# Altium PCB Master.PcbDoc
Units mm, origin at the board's own origin, x right, y up, seen from the top; angles counter-clockwise.
Board outline 19 x 23.4 mm, 2 copper layers (Top Layer, Bottom Layer); 7 components, 12 nets, 38 pads, 17 vias.
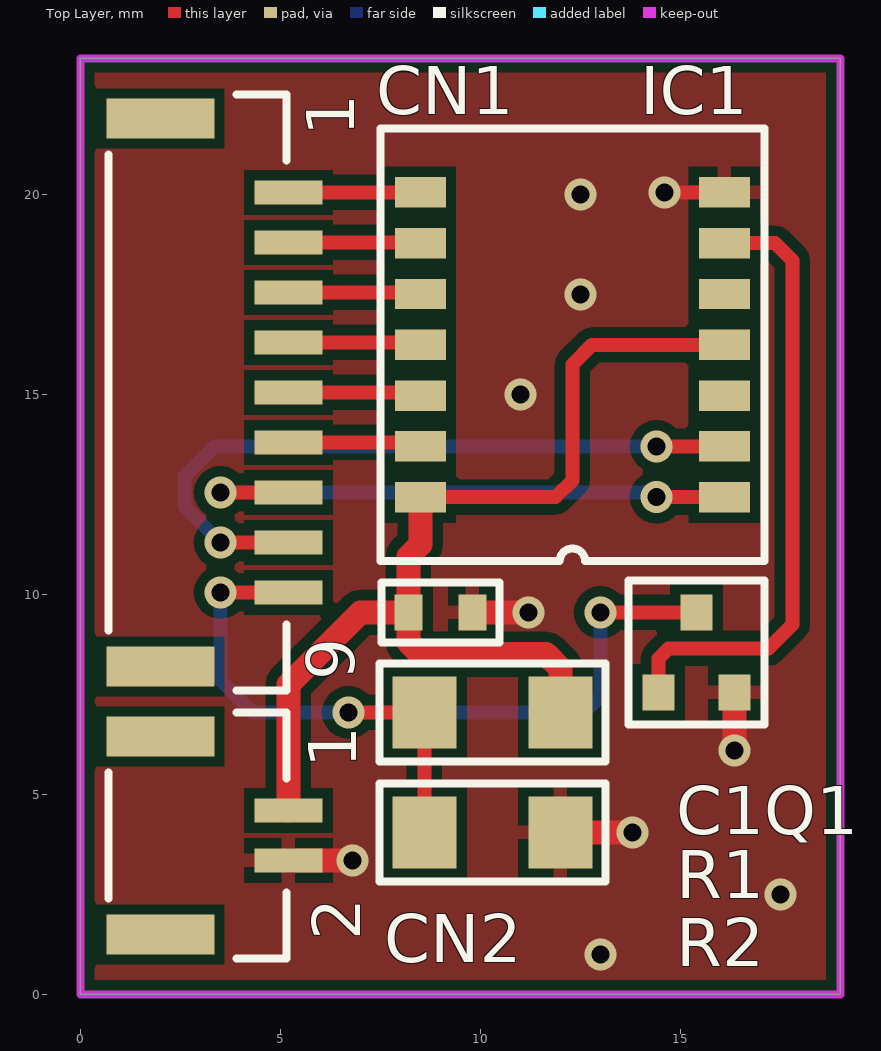
[diagram p0: Top Layer view]
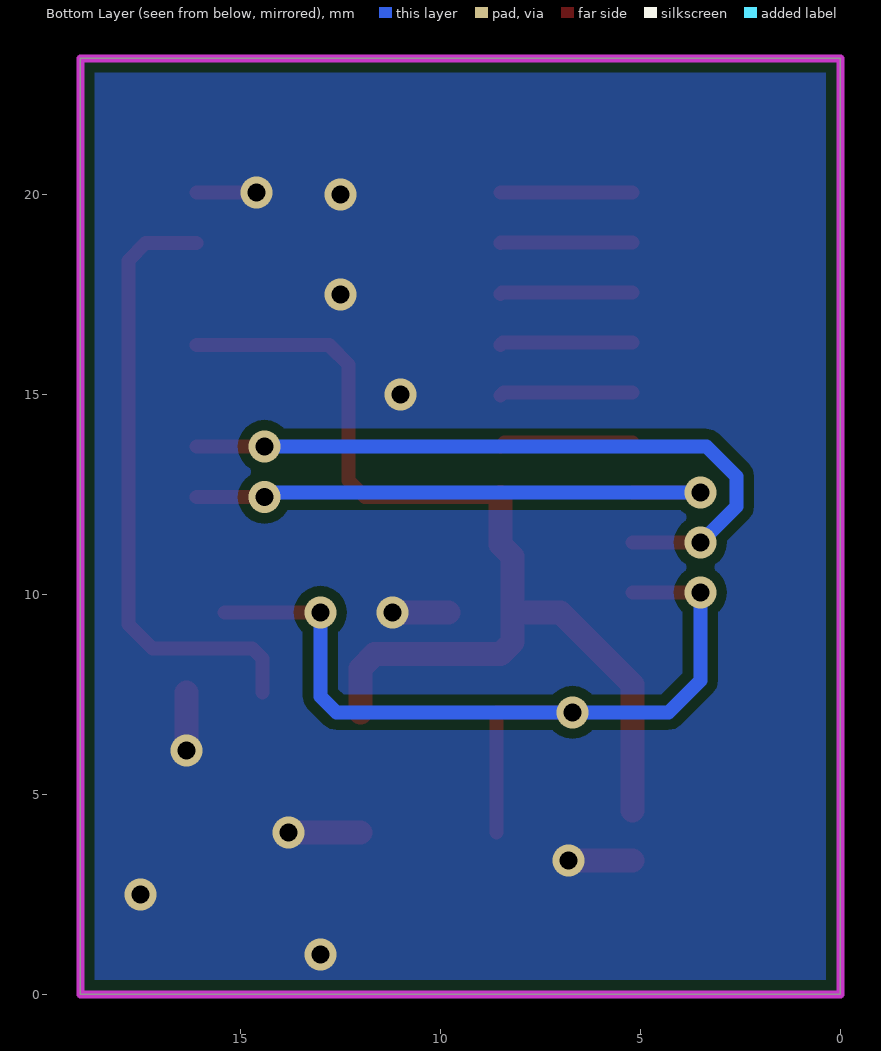
[diagram p1: Bottom Layer view, seen from below]

## Layer stack, top to bottom
Top Solder: solder mask 0.0102, Solder Resist, Dk 3.5
Top Layer: signal copper 0.0356
Dielectric 1: dielectric 0.32, FR-4, Dk 4.8
Bottom Layer: signal copper 0.0356
Bottom Solder: solder mask 0.0102, Solder Resist, Dk 3.5

## Board outline
0,0 0,23.4 19,23.4 19,0

## Design rules (kind name [scope] priority, off if disabled: settings)
Clearance [All] p1: gap=0.254 ignorepadtopadclearanceinfootprint=FALSE except(0: Arc-Hole Track-Hole SMDPad-Hole THPad-Hole Via-Hole Fill-Hole Poly-Hole Region-Hole Text-Hole)
HoleToHoleClearance [All] p1: gap=0.1 allowstackedmicrovias=TRUE
MinimumSolderMaskSliver [All] p1: minsoldermaskwidth=0.1
PolygonConnect [All] p1: thpad.connectstyle=Relief thpad.reliefconductorwidth=0.35 thpad.reliefentries=4 thpad.polygonreliefangle="90 Angle" thpad.airgapwidth=0.254 smdpad.connectstyle=Relief smdpad.reliefconductorwidth=0.35 smdpad.reliefentries=4 smdpad.polygonreliefangle="90 Angle" smdpad.airgapwidth=0.254 via.connectstyle=Direct via.reliefconductorwidth=0.254 via.reliefentries=4 via.polygonreliefangle="90 Angle" via.airgapwidth=0.254
RoutingVias [All] p1: holewidth=0.45 width=0.8 viastyle="Through Hole" minholewidth=0.45 minwidth=0.8 maxholewidth=0.45 maxwidth=0.8
SilkToSilkClearance [All] p1: silktosilkclearance=0.1
SilkToSolderMaskClearance [IsPad] p1: minsilkscreentomaskgap=0.1 clearancetoexposedcopper=TRUE
SolderMaskExpansion [All] p1: expansion=0.102
Width [All] p1: maxlimit=5 minlimit=0.1 preferedwidth=0.35
26 further rules are at their usual default settings.

## Components (designator, comment, footprint, x,y, rotation, side; value= is the part's Value field where it differs from the comment)
C1 "CL10F104ZB8NNNC" R1608 9,9.55 r0 top
CN1 "SM09B-GHS-TB" CN_SM09B-GHS-TB 5.2,20.05 r270 top
CN2 "SM02B-GHS-TB" CN_SM02B-GHS-TB 5.2,4.6 r270 top
IC1 "TC74ACT280F" SOP14-P-300-1.27A 16.1,12.43 r180 top
Q1 "2N7002K" SOT-23 15.4,8.55 r0 top
R1 "TJR8GTJ221VA" R3216 10.3,7.05 r180 top value=220
R2 "TJR8GTJ331VA" R3216 10.3,4.05 r0 top value=330

## Footprints (in the part's own frame and the unit in brackets; to place one, negate y for a bottom-side part, rotate by r counter-clockwise, add the part's x,y. Pads: shape width x height; smd on the part's side, far side on the other; paste and mask are expansions set on the pad)
CN_SM02B-GHS-TB [mm]
  rect 1x2.7 smd: 0(-1.85,-3.2) 0(3.1,-3.2)
  rect 0.6x1.7 smd: 1(0,0) 2(1.25,0)
  silkscreen extent -2.45,-4.5 3.7,-0.05
CN_SM09B-GHS-TB [mm]
  rect 1x2.7 smd: 0(-1.85,-3.2) 0(11.85,-3.2)
  rect 0.6x1.7 smd: 1(0,0) 2(1.25,0) 3(2.5,0) 4(3.75,0) 5(5,0) 6(6.25,0) 7(7.5,0) 8(8.75,0) 9(10,0)
  silkscreen extent -2.45,-4.5 12.45,-0.05
R1608 [mm]
  rect 0.7x0.9 smd: 1(-0.8,0) 2(0.8,0)
  silkscreen extent -1.47,-0.75 1.48,0.75
R3216 [mm]
  rect 1.6x1.8 smd: 1(-1.7,0) 2(1.7,0)
  silkscreen extent -2.83,-1.22 2.83,1.22
SOP14-P-300-1.27A [mm]
  rect 1.27x0.76 smd: 1(0,0) 2(0,-1.27) 3(0,-2.54) 4(0,-3.81) 5(0,-5.08) 6(0,-6.35) 7(0,-7.62) 8(7.6,-7.62) 9(7.6,-6.35) 10(7.6,-5.08) 11(7.6,-3.81) 12(7.6,-2.54) 13(7.6,-1.27) 14(7.6,0)
  silkscreen extent -1,-9.22 8.6,1.6
SOT-23 [mm]
  rect 0.8x0.9 smd: 1(-0.95,-1) 2(0.95,-1) 3(0,1)
  silkscreen extent -1.7,-1.8 1.7,1.8

## Part data
C1: "怜踢宍愊憌咀携负菝掭籣50V/0.1兪F", Distributor=棫嶳壢妛岺嬈噴, Maker=嶰惎揹婡, Name=怜踢宍愊憌咀携负菝掭籣50V/0.1兪F, Text Field1=嶰惎揹婡, Text Field2=怜踢宍愊憌咀携负菝掭籣50V/0.1兪F, Text Field3=?ŒÂ/Ø°Ù, Text Field4=棫嶳壢妛岺嬈噴
CN1: "GHºÈ¸À9P »²ÄÞŒ^ ÅÁ­×Ù", Distributor=桳尷夛幮傾僗僋, Maker=擔杮埑拝抂巕惢憿噴, Name="GHºÈ¸À9P »²ÄÞŒ^ ÅÁ­×Ù"
CN2: "GHºÈ¸À2P »²ÄÞŒ^ ÅÁ­×Ù", Distributor=桳尷夛幮傾僗僋, Maker=擔杮埑拝抂巕惢憿噴, Name="GHºÈ¸À2P »²ÄÞŒ^ ÅÁ­×Ù"
IC1: "9-Bit Parity Generator/Checker", Distributor=柤屆壆棟尋揹嬶噴, Maker=搶幣, Name="9-Bit Parity Generator/Checker"
Q1: "¼ØºÝNÁ¬ÝÈÙ MOS FET 60V 0.3A", Distributor=廐寧揹巕捠彜, Maker=PANJIT, Name="¼ØºÝNÁ¬ÝÈÙ MOS FET 60V 0.3A"
R1: "妏宍岤枌怜踢掞峈婍 0.25W/220兌", Distributor=棫嶳壢妛岺嬈噴, Maker=棫嶳壢妛岺嬈噴, Name="妏宍岤枌怜踢掞峈婍 0.25W/220兌"
R2: "妏宍岤枌怜踢掞峈婍 0.25W/330兌", Distributor=棫嶳壢妛岺嬈噴, Maker=棫嶳壢妛岺嬈噴, Name="妏宍岤枌怜踢掞峈婍 0.25W/330兌"

## Via types
v1: diameter 0.8, hole 0.45, Top Layer to Bottom Layer, 17 vias

## Nets (pads, with @x,y where several pads share a name; then routed paths per layer and width w, separated by ;. In a path a pad name is that pad's centre, name@x,y a point inside that pad or via, vN(x,y) a via of type N, cw(c..) or ccw(c..) an arc to the next point about the centre after c; other vN are vias at no path point)
5V: C1.1 CN2.1 IC1.4 IC1.14 R1.1 | length 26.7
  Top Layer w0.35: IC1.14 11.88,12.43 12.3,12.85 12.3,15.75 12.79,16.24 IC1.4
  Top Layer w0.6: CN2.1 5.2,7.75 7,9.55 C1.1 ; IC1.14 8.5,11.25 8.2,10.95 C1.1 ; R1.1 12,8.15 11.646,8.504 8.5,8.504 8.2,8.804 C1.1
DB0: CN1.1 IC1.8 | length 3.3
  Top Layer w0.35: CN1.1 IC1.8
DB1: CN1.2 IC1.9 | length 3.3
  Top Layer w0.35: CN1.2 8.48,18.8 IC1.9
DB2: CN1.3 IC1.10 | length 3.3
  Top Layer w0.35: CN1.3 8.46,17.55 IC1.10
DB3: CN1.4 IC1.11 | length 3.3
  Top Layer w0.35: CN1.4 8.44,16.3 IC1.11
DB4: CN1.5 IC1.12 | length 3.3
  Top Layer w0.35: CN1.5 8.42,15.05 IC1.12
DB5: CN1.6 IC1.13 | length 3.3
  Top Layer w0.35: CN1.6 8.4,13.8 IC1.13
DB6: CN1.7 IC1.1 | length 14.3
  Top Layer w0.35: v1(3.5,12.55) CN1.7 ; v1(14.4,12.43) IC1.1
  Bottom Layer w0.35: v1(3.5,12.55) 14.28,12.55 v1(14.4,12.43)
DB7: CN1.8 IC1.2 | length 17.5
  Top Layer w0.35: v1(3.5,11.3) CN1.8 ; v1(14.4,13.7) IC1.2
  Bottom Layer w0.35: v1(3.5,11.3) 2.6,12.2 2.6,12.95 3.35,13.7 v1(14.4,13.7)
DBP: CN1.9 Q1.3 R1.2 R2.1 | length 23.3
  Top Layer w0.35: v1(3.5,10.05) CN1.9 ; v1(6.7,7.05) R1.2 R2.1 ; v1(13,9.55) Q1.3
  Bottom Layer w0.35: v1(3.5,10.05) 3.5,7.85 4.3,7.05 v1(6.7,7.05) 12.6,7.05 13,7.45 v1(13,9.55)
GND: C1.2 CN2.2 IC1.7 Q1.2 R2.2 | length 7.8
  Top Layer w0.35: v1(14.6,20.05) IC1.7
  Top Layer w0.6: CN2.2 v1(6.8,3.35) ; C1.2 v1(11.2,9.55) ; R2.2 v1(13.8,4.05) ; v1(16.35,6.1) Q1.2
  other v1: 13,1 17.5,2.5 11,15 12.5,17.5 12.5,20
NetIC1_6: IC1.6 Q1.1 | length 15.5
  Top Layer w0.35: Q1.1 14.45,8.4 14.7,8.65 17.2,8.65 17.8,9.25 17.8,18.35 17.37,18.78 IC1.6
pads on no net: CN1.0 CN2.0 IC1.3 IC1.5

## Polygon pours and split planes (outlines as drawn)
GND on Top Layer "TOP_GND" (solid, remove dead copper, pour order 0): 0,0 19,0 19,23.4 0,23.4
GND on Bottom Layer "BTM_GND" (solid, remove dead copper, pour order 2): 0,0 19,0 19,23.4 0,23.4

## Keep-outs
Keep-Out Layer:
  the board outline again, w0.2

## Silkscreen, mask and mechanical layers (free items; w line width, h text height)
Drill Drawing:
  text ".Legend" at 0,25 h2

## Dimensions
0,0 to 0,23.4 on Mechanical 4
0,0 to 19,0 on Mechanical 4

## Text inside footprints (layer, text, board x,y; h text height)
CN1: Top Overlay "9" at 6.851,7.858 h1.2 r90; Top Overlay "1" at 6.851,21.447 h1.2 r90
CN2: Top Overlay "2" at 7,1.35 h1.2 r90; Top Overlay "1" at 6.9,5.65 h1.2 r90